# Altium PCB esp32_dht11.PcbDoc
Units mil, origin at the board's own origin, x right, y up, seen from the top; angles counter-clockwise.
Board outline 3340 x 2000 mil, 2 copper layers (Top Layer, Bottom Layer); 50 components, 36 nets, 199 pads, 47 vias.
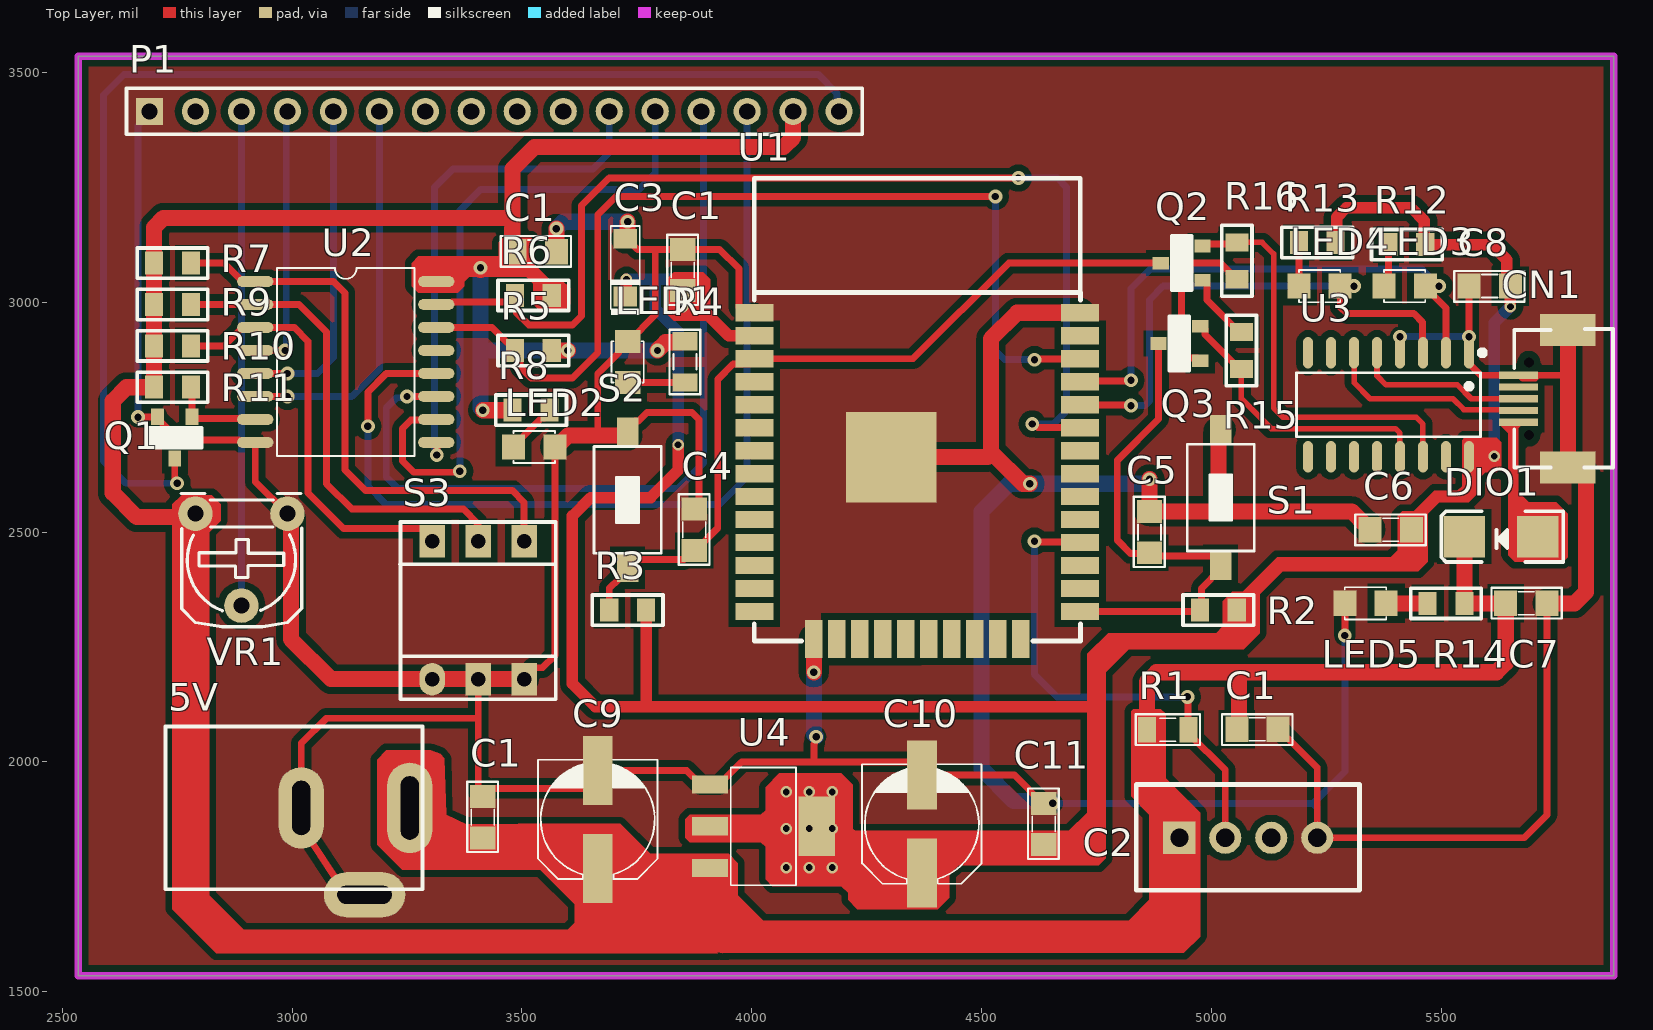
[diagram p0: Top Layer view]
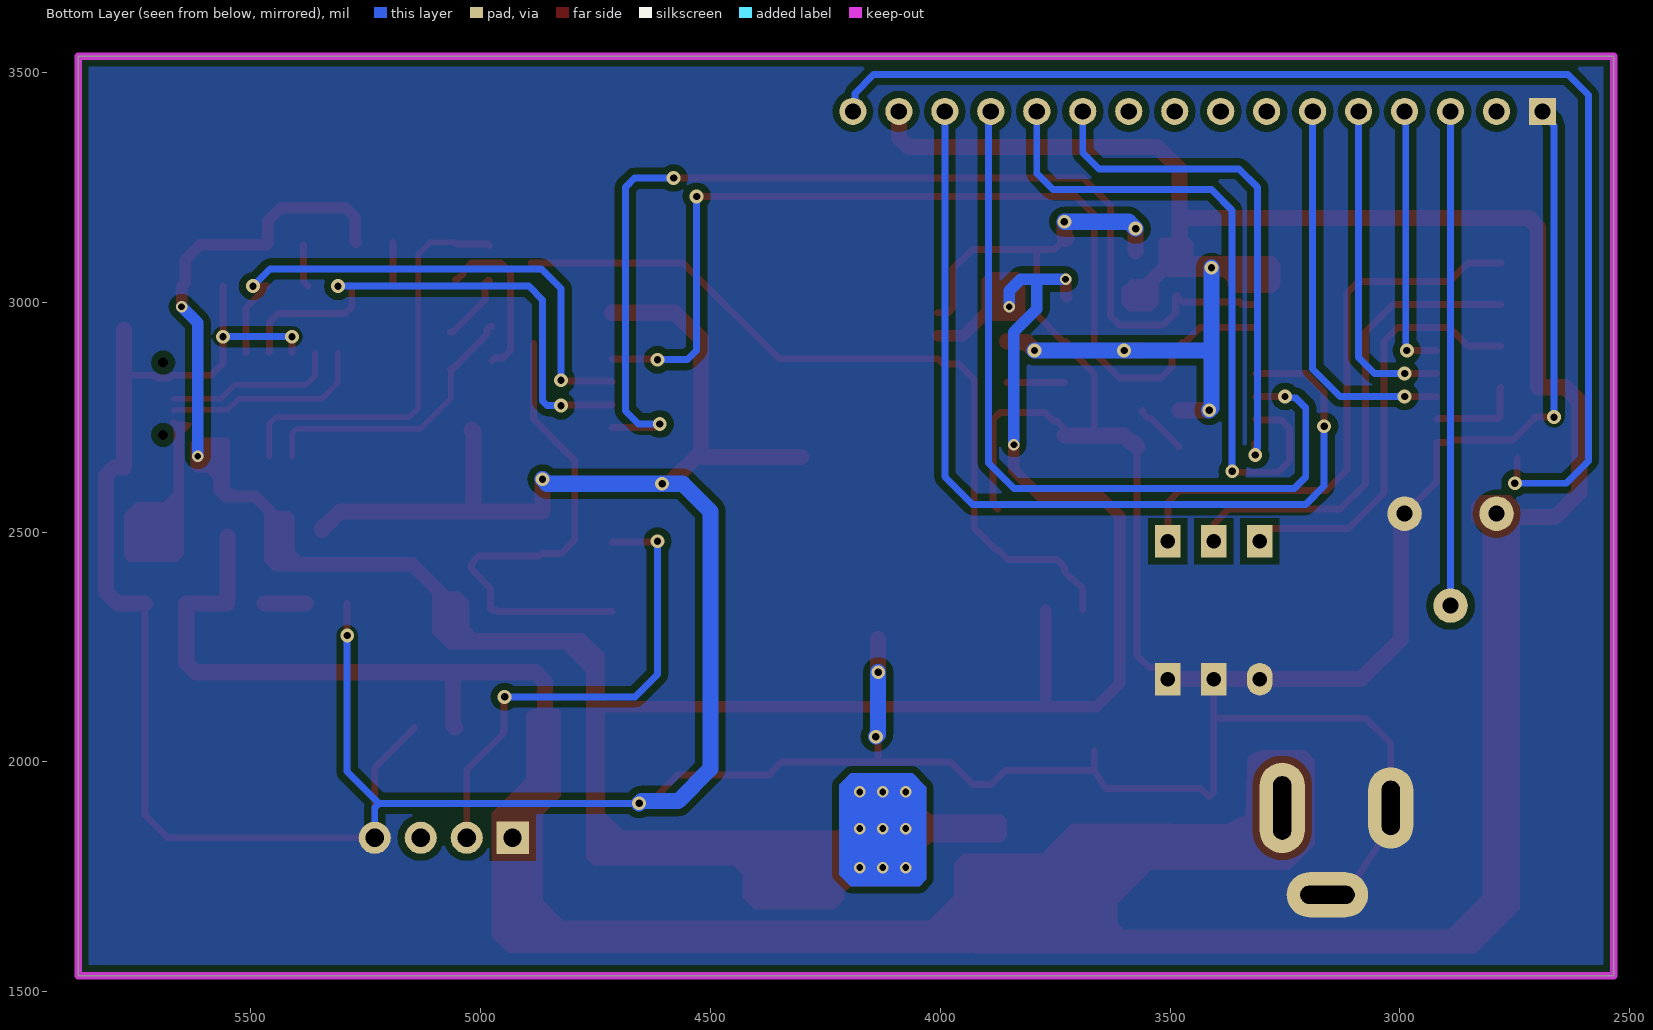
[diagram p1: Bottom Layer view, seen from below]
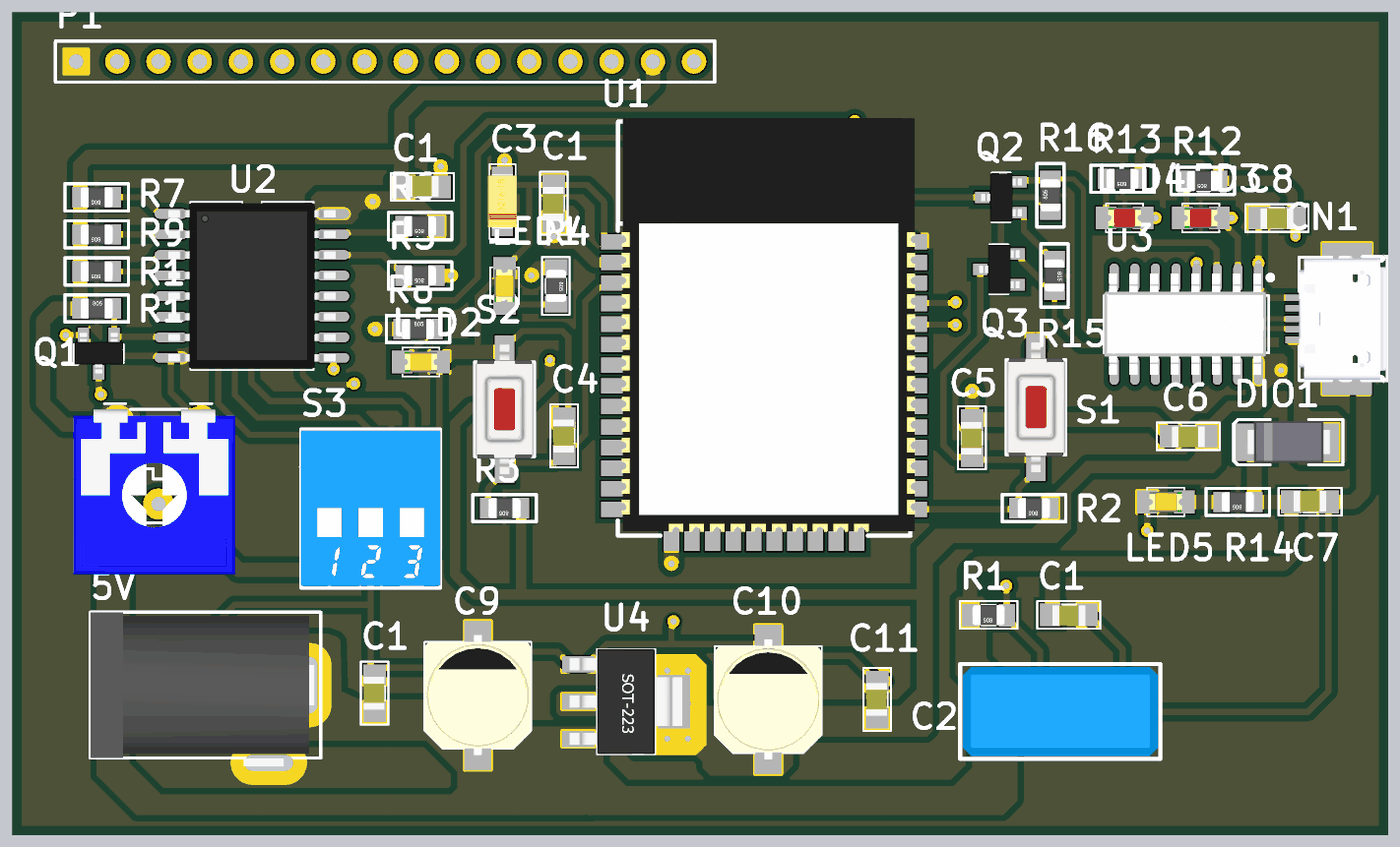
[diagram p2: 3D render of the assembled board from above, using the file's embedded part models]

## Layer stack, top to bottom
Top Solder: solder mask 0.4, Solder Resist, Dk 3.5
Top Layer: signal copper 1.4
Dielectric 1: dielectric 12.6, FR-4, Dk 4.8
Bottom Layer: signal copper 1.4
Bottom Solder: solder mask 0.4, Solder Resist, Dk 3.5

## Board outline
2535,1535 5875,1535 5875,3535 2535,3535

## Design rules (kind name [scope] priority, off if disabled: settings)
Clearance [All] p1: gap=15 ignorepadtopadclearanceinfootprint=FALSE
PlaneConnect [All] p1: planeconnectstyle=Direct reliefexpansion=20 reliefentries=4 reliefconductorwidth=10 reliefairgap=10
PolygonConnect [All] p1: connectstyle=Direct reliefconductorwidth=10 reliefentries=4 polygonreliefangle="90 Angle" airgapwidth=10
RoutingVias [All] p1: holewidth=16 width=30 viastyle="Through Hole" minholewidth=16 minwidth=30 maxholewidth=28 maxwidth=50
SolderMaskExpansion [All] p1: expansion=4 istentingtop=FALSE
Width [All] p1: maxlimit=35 minlimit=15 preferedwidth=20
29 further rules are at their usual default settings.

## Classes and differential pairs
component class U_power: "5V " C1 C9 C10 C11 U4
component class U_usbtouart: C6 C7 C8 CN1 DIO1 LED3 LED4 LED5 Q2 Q3 R12 R13 R14 R15 R16 U3
component class U_mcu: C1 C3 C4 C5 LED1 R2 R3 R4 S1 S2 U1
component class U_lcd: C1 LED2 P1 Q1 R5 R6 R7 R8 R9 R10 R11 S3 U2 VR1
component class U_dht11: C1 C2 R1

## Components (designator, comment, footprint, x,y, rotation, side; value= is the part's Value field where it differs from the comment)
5V "Jack DC5.5x2.1" DC-IN 2724.72,1722.83 r0 top (schematic designator JDC)
C1 "104" 0805 3415,1880 r270 top value=0.1uF
C1 "104" 0805 5100,2071 r0 top value=0.1uF
C1 "104" 0805 3530,3110 r180 top value=0.1uF
C1 "104" 0805 3850,3070 r270 top value=0.1uF
C2 "DHT11" DHT11 4930,1835 r0 top
C3 "22uF-1206" CAP1206_TANTALUM_YELLOW 3725,3075 r90 top value=10uF
C4 "104" 0805 3875,2505 r270 top value=0.1uF
C5 "104" 0805 4865,2500 r270 top value=0.1uF
C6 "104" 0805 5390,2505 r0 top value=0.1uF
C7 "104" 0805 5685,2345 r180 top value=0.1uF
C8 "104" 0805 5605,3035 r0 top value=0.1uF
C9 "Cap Polar" CAP_ALUMINUM_SMD_SIZE_D 3665,1875 r90 top value=100uF
C10 "Cap Polar" CAP_ALUMINUM_SMD_SIZE_D 4370,1865 r90 top value=100uF
C11 "104" 0805 4635,1865 r270 top value=0.1uF
CN1 "USB Connector" USB-B-Micro-Hole 5775,2790 r270 top
DIO1 "Diode SMD" DIO-SMD-106 5630,2490 r0 top value=1N5007
LED1 "LED" LED-0805-Orange 3730,2825 r90 top value="LED 3 - 5 ly 2 Colour"
LED2 "LED" LED-0805-Orange 3481.94,2685 r0 top value="LED 3 - 5 ly 2 Colour"
LED3 "LED" LED-0805-Red 5375,3035 r0 top value="LED 3 - 5 ly 2 Colour"
LED4 "LED" LED-0805-Red 5190,3035 r0 top value="LED 3 - 5 ly 2 Colour"
LED5 "LED" LED-0805-Orange 5380,2345 r180 top value="LED 3 - 5 ly 2 Colour"
P1 "Header 16" HDR1X16 2690,3415 r0 top
Q1 "C1815_SMD" SOT23 2745,2705.28 r180 top
Q2 "C1815_SMD" SOT23 4935,3085 r90 top
Q3 "C1815_SMD" SOT23 4930,2910 r90 top
R1 "0805-4.7K" RES-SMD-0805 4905,2070 r180 top
R2 "R0805" "DIEN TRO 0805" 5015,2330 r0 top value=0805-10K
R3 "R0805" "DIEN TRO 0805" 3730,2330 r0 top value=0805-10K
R4 "0805-1K" RES-SMD-0805 3855,2870 r270 top
R5 "R0805-4k7" "DIEN TRO 0805" 3525,2895 r0 top value=0805-4k7
R6 "R0805-4k7" "DIEN TRO 0805" 3525,3015 r0 top value=0805-4k7
R7 "R0805-10K" "DIEN TRO 0805" 2740,3085 r0 top value=0805
R8 "R0805" "DIEN TRO 0805" 3520,2765 r180 top value=0805-1K
R9 "R0805-10K" "DIEN TRO 0805" 2740,2995 r0 top value=0805
R10 "R0805-10K" "DIEN TRO 0805" 2740,2905 r0 top value=0805
R11 "R0805" "DIEN TRO 0805" 2740,2815 r180 top value=0805
R12 "R0805" "DIEN TRO 0805" 5425,3125 r0 top value=1K
R13 "R0805" "DIEN TRO 0805" 5230,3130 r0 top value=1K
R14 "R0805" "DIEN TRO 0805" 5510,2345 r0 top value=0805
R15 "R0805" "DIEN TRO 0805" 5065,2895 r90 top value=0805-10K
R16 "R0805" "DIEN TRO 0805" 5055,3090 r270 top value=0805-10K
S1 "MH001036" SW-SMD 5020,2575 r90 top value="Nút Nhấn 2 Chân 3x6x2.5MM SMD"
S2 "MH001036" SW-SMD 3730,2570 r90 top value="Nút Nhấn 2 Chân 3x6x2.5MM SMD"
S3 "SW DIP3" DIPSWITCH3 3305,2180 r0 top
U1 "ESP32-WROOM-32D-N8" ESP32-SMD 4360,2750 r270 top
U2 "PCF8574T/3,518" SO-16-WIDE 3116.85,2870 r0 top
U3 "CH340C" SOP-16_L10.0-W3.9-P1.27-LS6.0-BL 5388.44,2776.91 r180 top
U4 "AMS1117_3V3" SOT223-4M 4035,1860 r270 top
VR1 "10K" VR 2990,2540 r180 top value="VR 10K"

## Footprints (in the part's own frame and the unit in brackets; to place one, negate y for a bottom-side part, rotate by r counter-clockwise, add the part's x,y. Pads: shape width x height; smd on the part's side, far side on the other; paste and mask are expansions set on the pad)
0805 [mil] "Compoment SMD 80x50mil"
  rect 50x55 smd: 1(-45,0) 2(45,0)
  silkscreen extent -77,-34 76,33, body extent -40,-27 40,23, height 24
CAP1206_TANTALUM_YELLOW [mm]
  rect 1.1x1.3 smd: 1(-1.6,0) 2(1.6,0)
  silkscreen extent -2.6,-0.8 2.3,0.8, body extent -1.7,-0.9 1.7,0.9, height 1.75
CAP_ALUMINUM_SMD_SIZE_D [mil] "SMD Tantalum Capacitor; Size D8, Body 6.3 x 5.4 mm (LxW typ)"
  rect 150x65 smd: 1(-106.3,0) 2(106.3,0)
  silkscreen extent -130,-130 130,130, body extent -145,-130 146,130, height 303
DC-IN [mm] "Jac DC input"
  oval 2.5x5 hole 1 slot 3.5 at 90 deg: 1(13.5,4.5)
  oval 2.5x4.5 hole 1 slot 3 at 90 deg: 2(7.5,4.5)
  oval 4.5x2.5 hole 1 slot 3 at 0 deg: 3(11,-0.3)
  silkscreen extent 0,0 14.2,9, body extent 0,-0.5 13.83,9, height 11.02
DHT11 [mil]
  rect 70x70 hole 39.37 unplated: 1(0,0)
  round 70 hole 39.37 unplated: 2(100,0) 3(200,0)
  round 70 hole 39.37 unplated mask+4: 4(300,0)
  silkscreen extent -94,-114 392,116, body extent -87,-107 385,110, height 611
"DIEN TRO 0805" [mil] "Chip Resistor; Body 2.0 x 1.3 mm (LxW typ)"
  rect 39.37x50 smd: 1(-40,0) 2(40,0)
  silkscreen extent -77,-33 77,33, body extent -39,-25 39,25, height 31
DIO-SMD-106 [mil]
  rect 90x90.55 smd: 1(80,0) 2(-80,0)
  silkscreen extent -130,-55 135,55, body extent -99,-50 106,52, height 95
DIPSWITCH3 [mm]
  oval 1.4x1.8 hole 0.8: 1(0,0)
  rect 1.4x1.8 hole 0.8: 2(2.54,0) 3(5.08,0) 4(5.08,7.62) 5(2.54,7.62) 6(0,7.62)
  silkscreen extent -1.78,-1.12 6.83,8.69, body extent -1.77,-0.99 6.85,8.61, height 6.3
ESP32-SMD [mm]
  rect 0.95x2.1 smd: 1(-5.767,-9) 2(-4.497,-9) 3(-3.227,-9) 4(-1.957,-9) 5(-0.687,-9) 6(0.583,-9) 7(1.853,-9) 8(3.123,-9) 9(4.393,-9) 10(5.663,-9) 11(6.933,-9) 12(8.203,-9) 13(9.473,-9) 14(10.743,-9) 25(10.743,9) 26(9.473,9) 27(8.203,9) 28(6.933,9) 29(5.663,9) 30(4.393,9) 31(3.123,9) 32(1.853,9) 33(0.583,9) 34(-0.687,9) 35(-1.957,9) 36(-3.227,9) 37(-4.497,9) 38(-5.767,9)
  rect 2.1x0.95 smd: 15(12.264,-5.715) 16(12.264,-4.445) 17(12.264,-3.175) 18(12.264,-1.905) 19(12.264,-0.635) 20(12.263,0.635) 21(12.263,1.905) 22(12.263,3.175) 23(12.263,4.445) 24(12.263,5.715)
  rect 5x5 smd: 39(2.204,-1.45)
  silkscreen extent -13.19,-9.02 12.37,9.02, body extent -13.41,-8.76 12.13,9.31, height 3
HDR1X16 [mm] "Connector; Header; 16 Position"
  rect 1.5x1.5 hole 0.9: 1(0,0)
  round 1.5 hole 0.9: 2(2.54,0) 3(5.08,0) 4(7.62,0) 5(10.16,0) 6(12.7,0) 7(15.24,0) 8(17.78,0) 9(20.32,0) 10(22.86,0) 11(25.4,0) 12(27.94,0) 13(30.48,0) 14(33.02,0) 15(35.56,0) 16(38.1,0)
  silkscreen extent -1.27,-1.27 39.37,1.27
LED-0805-Orange [mil]
  rect 50x55 smd: 1(0,0) 2(90,0)
  silkscreen extent 0,-35 90,35, body extent 5,-25 85,25, height 43
LED-0805-Red [mil]
  rect 50x55 smd: 1(0,0) 2(90,0)
  silkscreen extent 0,-35 90,35, body extent 5,-25 85,25, height 43
RES-SMD-0805 [mil]
  rect 39.37x55 smd: 1(-45,0) 2(45,0)
  silkscreen extent -70,-34 70,33, body extent -39,-25 39,25, height 31
SO-16-WIDE [mm]
  oval 2x0.6 smd: 1(-5,4.445) 2(-5,3.175) 3(-5,1.905) 4(-5,0.635) 5(-5,-0.635) 6(-5,-1.905) 7(-5,-3.175) 8(-5,-4.445) 9(5,-4.445) 10(5,-3.175) 11(5,-1.905) 12(5,-0.635) 13(5,0.635) 14(5,1.905) 15(5,3.175) 16(5,4.445)
  silkscreen extent -3.8,-5.19 3.8,5.19, body extent -5.15,-5.1 5.15,5.1, height 3.5
SOP-16_L10.0-W3.9-P1.27-LS6.0-BL [mm]
  oval 0.56x1.745 smd: 1(-4.357,-2.873) 2(-3.087,-2.873) 3(-1.817,-2.873) 4(-0.547,-2.873) 5(0.723,-2.873) 6(1.993,-2.873) 7(3.263,-2.873) 8(4.533,-2.873) 9(4.533,2.873) 10(3.263,2.873) 11(1.993,2.873) 12(0.723,2.873) 13(-0.547,2.873) 14(-1.817,2.873) 15(-3.087,2.873) 16(-4.357,2.873)
  silkscreen extent -5.24,-3.02 5.16,1.77, body extent -4.83,-3.12 5.16,3.12, height 1.58
SOT23 [mm] "SOT 23 _ 1-3-2"
  rect 0.7x0.9 smd: 1(-0.95,-1.15) 2(0.95,-1.15) 3(0,1.15)
  silkscreen extent -1.5,-0.55 1.5,0.55, body extent -1.5,-1.28 1.5,1.22, height 1.06
SOT223-4M [mm] "SOT223, 4-Leads, Body 6.5x3.5mm, Pitch 2.3mm, Lead Span 7mm, IPC Low Density"
  rect 1x2 smd: 1(-2.3,-3.2) 2(0,-3.2) 3(2.3,-3.2)
  rect 3.3x2 smd: 4(0,2.7)
  silkscreen extent -3.25,-2.05 3.26,1.55, body extent -3.25,-3.74 3.25,3.22, height 1.67
SW-SMD [mm] "Switch SMD type"
  rect 1.6x1.2 smd: 1(-3.75,0) 2(3.75,0)
  silkscreen extent -2.95,-1.85 2.95,1.85, body extent -4,-1.8 4,1.8, height 2.5
USB-B-Micro-Hole [mm]
  round 0.4 hole 0.55: 0(-2,-2.15) 0(2,-2.15)
  rect 0.4x2.159 smd: 1(1.3,-2.725) 2(0.65,-2.725) 3(0,-2.725) 4(-0.65,-2.725) 5(-1.3,-2.725)
  rect 1.778x3.048 smd: 6(-3.8,0) 7(3.8,0)
  silkscreen extent -3.85,-2.95 3.8,2.5, body extent -3.99,-2.95 3.99,2.48, height 2.71
VR [mil] "Resistor Variable"
  round 75 hole 35: 1(0,0) 2(100,200) 3(200,0)
  silkscreen extent -31,-44 231,246, body extent -87,-30 307,372, height 165

## Part data
5V: library part Jac_DC, "Cắm", Chung_Loai=Cắm, Don_Vi=Con, Ma_Hang=MH000923, Ten_Linh_Kien="Jack DC5.5x2.1MM DC5501"
C1 C1 C1 C1 C4 C5 C6 C7 C8 C11: library part "Cap 104_SMD", "Capacitor (Semiconductor SIM Model)", LatestRevisionDate=17-Jul-2002, LatestRevisionNote="Re-released for DXP Platform.", PackageReference=C1206, Published=8-Jun-2000, Publisher="Altium Limited"
C2: Manufacturer="W¨¹rth Elektronik eiSos GmbH", partNo=613004143121, ComponentLink1 Description=Manufacturer, ComponentLink1URL=http://www.we-online.com, ComponentLink2 Description=Datasheet, ComponentLink2URL=http://katalog.we-online.de/em/datasheet/6130xx143121.pdf, Created by="Karrer Zheng", Created Date="29 March 2013", NoPins=04
C3: library part T491A106K016AT, "CAP TANT 10UF 16V 10% 1206", Capacitance=10µF, ESR (Equivalent Series Resistance)="7 Ohm", Lifetime @ Temp.="2000 Hrs @ 85°C", Manufacturer 1=KEMET, Manufacturer Size Code=A, Operating Temperature="-55°C ~ 125°C", Package / Case="1206 (3216 Metric)", Supplier Part Number 1=399-8269-1-ND, Tolerance=±10%, Voltage - Rated=16V, Category 1=Capacitors, ComponentLink1Description=http://www.kemet.com/Lists/ProductCatalog/Attachments/254/KEM_T2005_T491.pdf, ComponentLink1URL=http://www.kemet.com/Lists/ProductCatalog/Attachments/254/KEM_T2005_T491.pdf, Description 1="CAP TANT 10UF 16V 10% 1206", Failure Rate=-, Features="General Purpose", Height - Seated (Max)="0.071\" (1.80mm)", Lead Spacing=-, Manufacturer Part Number 1=T491A106K016AT, Mounting Type="Surface Mount", Packaging="Cut Tape (CT)", Part Status=Active, Pricing 1="1=0.45, 10=0.312, 100=0.1873, 500=0.14048, 1000=0.11862 (USD)", RoHS 1="RoHS Compliant", Size / Dimension="0.126\" L x 0.063\" W (3.20mm x 1.60mm)", Stock 1=54083, Supplier 1=Digi-Key, Type=Molded
C9 C10: "Polarized Capacitor", LatestRevisionDate=17-Jul-2002, LatestRevisionNote="Re-released for DXP Platform.", PackageReference=POLAR0.8, Published=8-Jun-2000, Publisher="Altium Limited"
CN1: library part USB_MICRO_TYPE_B
DIO1: "Default Diode", Code - JEDEC=DO-214-AB, Published=8-Jun-2000, Publisher="Altium Limited", Revision="July-2002: Re-released for DXP Platform."
LED1 LED2 LED3 LED4 LED5: library part "LED SMD"
P1: "Header, 16-Pin", LatestRevisionDate=17-Jul-2002, LatestRevisionNote="Re-released for DXP Platform.", Publisher="Altium Limited"
Q1 Q2 Q3: "NPN General Purpose Amplifier", Code_JEDEC=TO-92A, ComponentLink1Description="Manufacturer Link", ComponentLink1URL=http://www.fairchildsemi.com/, ComponentLink2Description=Datasheet, ComponentLink2URL=http://www.fairchildsemi.com/ds/2N%2F2N3904.pdf, DatasheetVersion=1997, LatestRevisionDate=15-Jan-2003, LatestRevisionNote="PCB Footprint 'BCY-W3/D4.7' replaced", PackageReference=TO-92A, PackageVersion=Sep-1998, Published=8-Jun-2000, Publisher="Altium Limited"
R1 R4: library part Res-SMD, "Resistor", Manufacturer="Generic Components", Class=Passive, Published=08/06/2000, Publisher="Altium Hobart Technology Centre"
R2 R3 R11 R12 R13 R14 R15 R16: "Resistor SMD 0805", LatestRevisionDate=17-Jul-2002, LatestRevisionNote="Re-released for DXP Platform.", PackageReference=AXIAL-0.4, Published=8-Jun-2000, Publisher="Altium Limited"
R5 R6: library part R0805, "Resistor SMD 0805", LatestRevisionDate=17-Jul-2002, LatestRevisionNote="Re-released for DXP Platform.", PackageReference=AXIAL-0.4, Published=8-Jun-2000, Publisher="Altium Limited"
R7 R9 R10: library part R0805, "Resistor SMD 0805-10K", LatestRevisionDate=17-Jul-2002, LatestRevisionNote="Re-released for DXP Platform.", PackageReference=AXIAL-0.4, Published=8-Jun-2000, Publisher="Altium Limited"
R8: "Resistor SMD 0805-1K", LatestRevisionDate=17-Jul-2002, LatestRevisionNote="Re-released for DXP Platform.", PackageReference=AXIAL-0.4, Published=8-Jun-2000, Publisher="Altium Limited"
S1 S2: library part SW-SMD, "Dán"
S3: "DIP Switch, 3 Position, SPST", Code_JEDEC=MO-001-AM, LatestRevisionDate=17-Jul-2002, LatestRevisionNote="Re-released for DXP Platform.", PackageReference=DIP-6, Published=24-Mar-1999, Publisher="Altium Limited"
U2: "IC I/O EXPANDER I2C 8B 16SOIC", Current - Output Source/Sink="300µA, 25mA", Manufacturer="NXP USA Inc.", Operating Temperature="-40°C ~ 85°C", Package / Case="16-SOIC (0.295\", 7.50mm Width)", Supplier Device Package=16-SO, Supplier Part Number 1=568-1077-1-ND, Voltage - Supply="2.5 V ~ 6 V", Category="Integrated Circuits (ICs)", ComponentLink1Description=http://www.nxp.com/documents/data_sheet/PCF8574_PCF8574A.pdf, ComponentLink1URL=http://www.nxp.com/documents/data_sheet/PCF8574_PCF8574A.pdf, Features=POR, Interface=I²C, Interrupt Output=Yes, Manufacturer Part Number=PCF8574T/3,518, Mounting Type="Surface Mount", Number of I/O=8, Output Type=Push-Pull, Packaging="Cut Tape (CT)", Part Status=Active, Pricing 1="1=1.22, 10=1.094, 100=0.8528, 500=0.70452 (USD)", RoHS="RoHS Compliant", Stock 1=21482, Supplier 1=Digi-Key
U4: "1A Regulator"
VR1: library part VR_1, "Var Resistor"

## Via types
v1: diameter 30, hole 16, Top Layer to Bottom Layer, 33 vias
v2: diameter 25, hole 15, Top Layer to Bottom Layer, 14 vias

## Nets (pads, with @x,y where several pads share a name; then routed paths per layer and width w, separated by ;. In a path a pad name is that pad's centre, name@x,y a point inside that pad or via, vN(x,y) a via of type N, cw(c..) or ccw(c..) an arc to the next point about the centre after c; other vN are vias at no path point)
5V: P1.2
+3V3: C1.2@3850,3025 C3.1 C6.2 C8.2 C10.1 C11.2 R2.2 R3.2 R12.2 R13.2 U1.2 U3.16 U4.2 U4.4 | length 3932.1
  Top Layer w20: U4.4 4146.3,1855 v2(4175,1855)
  Top Layer w25: C3.1 3727.5,3014.51 v2(3727.5,3050) ; R3.2 3770,2125 3775,2120 ; v2(3840,2690) 3840,2635 3780,2575 3650,2575 3610,2535 3610,2170 3660,2120 3770,2120 4745,2120 4750,2115 ; v2(3850,2990) 3850,3025 3852.5,3025 3909.5,2968 3909.5,2967.21 3949.67,2927.03 U1.2 ; R13.2 5272.19,3132.19 5272.19,3184.5 5292.69,3205 5435,3205 5462.81,3177.19 5462.81,3127.19 R12.2 5610,3125 5642.5,3092.5 5642.5,3042.5 C8.2 v2(5650,2990) ; U3.16 5561.18,2665 v2(5615,2665)
  Bottom Layer w25: v2(3727.5,3050) 3790,3050 ; v2(3840,2690) 3840,2935 3790,2985 3790,3050 ; v2(3850,2990) 3850,3025 3825,3050 3790,3050 ; v2(5615,2665) 5615,2955 v2(5650,2990)
  other v2: 4075,1770 4125,1770 4175,1770 4075,1855 4125,1855 4075,1935 4125,1935 4175,1935
+5: 5V.1 C1.1@5055,2071 C1.2@3415,1835 C1.2@3485,3110 C2.1 C7.2 C9.1 DIO1.2 P1.15 R1.2 R4.1 R5.2 R6.2 R7.1 R8.2 R9.1 R10.1 R11.2 R14.2 U2.16 U4.3 VR1.3 | length 4780
  Top Layer w35: VR1.3 2782.35,2532.35 2662.65,2532.35 2610,2585 2610,2785 2640,2815 R11.2 R10.1 R9.1 R7.1 2700,3162.83 2720.5,3183.33 3480,3183.33 ; v1@3410,3070 v1(3410,3075) ; v1(3415,2765) R8.2 ; C1.2@3485,3110 3479.13,3115.87 3479.13,3160.87 3480,3161.75 3480,3183.33 ; R5.2 v1(3600,2895) ; v1(3795,2895) 3812.82,2912.82 3845,2912.82 3847.19,2915 R4.1 ; P1.15 4090,3358.2 4069.5,3337.7 3527.7,3337.7 3480,3290 3480,3183.33 ; R1.2 4860,2174.5 4880.5,2195 5060,2195 ; C1.1@5055,2075 5060,2080 5060,2195 ; DIO1.2 R14.2 C7.2 5640,2215.5 5619.5,2195 5060,2195
  Bottom Layer w35: v1(3410,3075) 3410,2895 ; v1(3415,2765) 3410,2770 3410,2895 ; v1(3795,2895) 3410,2895
CS: P1.6 U2.6 | length 854.9
  Top Layer w15: U2.6 v1(2990,2795)
  Bottom Layer w15: v1(2990,2795) 3130,2795 3190,2855 P1.6
DB4: P1.11 U2.9 | length 1113.7
  Top Layer w15: U2.9 3315,2693.7 v1(3315,2667.5)
  Bottom Layer w15: v1(3315,2667.5) 3312.13,2670.37 3312.13,2680.98 3310,2683.11 3310,3250 3350,3290 3655,3290 3690,3325 P1.11
DB5: P1.12 U2.10 | length 1449
  Top Layer w15: U2.10 3312.05,2743.35 3258.35,2743.35 3240,2725 3240,2655 3265,2630 3362.5,2630 v1(3365,2632.5)
  Bottom Layer w15: v1(3365,2632.5) 3365,3200 3410,3245 3755,3245 3790,3280 P1.12
DB6: P1.13 U2.11 | length 1759.3
  Top Layer w15: v1(3250,2795) U2.11
  Bottom Layer w15: v1(3250,2795) 3247.13,2792.13 3227.13,2792.13 3205,2770 3205,2620 3230,2595 3840,2595 3895,2650 3895,3410 P1.13
DB7: P1.14 U2.12 | length 2031.7
  Top Layer w15: v1(3165,2730) 3165,2805 3205,2845 U2.12
  Bottom Layer w15: v1(3165,2730) 3165,2600 3205,2560 3930,2560 3990,2620 P1.14
DTR: Q3.2 R15.1 U3.13 | length 627.2
  Top Layer w12: R15.1 5065,2790 5130,2725 5400,2725 5410,2715 U3.13
  Top Layer w15: Q3.2 4979.21,2947.4 4985.49,2941.12 4985.49,2929.51 5047.5,2867.5 5047.5,2867.19 5059.69,2855 R15.1
EN: C4.2 Q2.3 R3.1 S2.1 U1.3 | length 1735.4
  Top Layer w15: R3.1 3690,2377.5 3710.87,2398.37 3713.88,2398.37 3730,2414.49 3730,2423.88 3746.12,2440 3852.5,2440 3872.5,2460 3877.5,2460 3926.04,2508.54 3926.04,2832.19 3959.69,2865.83 3994.47,2865.83 U1.3 4351.13,2877.03 4559.09,3085 Q2.3
GND: 5V.2 5V.3 C1.1@3415,1925 C1.1@3575,3110 C1.1@3850,3115 C1.2@5145,2071 C2.4 C3.2 C4.1 C5.1 C6.1 C7.1 C8.1 C9.2 C10.2 C11.1 CN1.5 CN1.6 CN1.7 LED1.2 LED2.2 LED5.2 P1.1 Q1.2 S1.2 S2.2 S3.1 S3.2 S3.3 U1.1 U1.15 U1.38 U1.39 U2.8 U3.1 U3.4 U4.1 VR1.1 | length 13218.9
  Top Layer w15: v1(2665,2750) 2665.28,2750.28 2707.32,2750.28 Q1.2 2707.6,2746.61 2754,2700.22 2818.62,2700.22 2818.84,2700 2885.11,2700 2890.11,2695 U2.8 2920,2610 VR1.1 ; 5V.3 3118.43,1711.02 3020,1860.63 5V.2 3020,2040 3075,2095 3405,2095 ; S3.2 3405,2095 ; S3.3 3505,2184.85 3525.06,2204.91 3544.91,2204.91 3571.94,2231.94 LED2.2 ; C9.2@3665,2023.8 C9.2 ; 3665,2709.76 3665,2844.32 3710,2889.32 3710,2897.5 3727.5,2915 LED1.2 3732.5,2915 3790,2972.5 3790,3115 ; C3.2 3725.85,3137.99 3728.94,3137.99 3751.93,3115 3790,3115 ; S2.2 3730,2725.51 3746.12,2741.63 3754,2741.63 3772.36,2760 3870,2760 3885,2745 3885,2560 C4.1 ; U1.1 3983.04,2977.03 3971.84,2988.23 3971.84,3073.16 3930,3115 3850,3115 3790,3115 ; v1(4140,2055) 4137.13,2052.13 4137.13,2041.52 4135,2039.39 4135,2000 ; v1(4655,1910) C11.1 4632.5,1910 4571.2,1971.3 C10.2 4370,1975 4345,2000 4135,2000 ; C1.2@5145,2075 5145,2072.5 5230,1987.5 C2.4 5680,1835 5730,1885 C7.1 ; v1(5290,2275) LED5.2 ; U3.4 v1(5410,2925) ; C8.1 v1(5560,2925) U3.1 5560,2866.67 5585.49,2841.18 CN1.5 5670.78,2841.18 5676.55,2835.41 5704.16,2835.41 5709.93,2841.18 5773.82,2841.18 5775,2840 ; 3405,2095 3405,1935 3415,1925 3435,1942.5 3640,1942.5 C9.2 ; C9.2 3858.58,1981.3 3889.33,1950.55 U4.1 3928.7,1950.55 3978.15,2000 4135,2000
  Top Layer w20: S2.2@3730,2709.76 S2.2
  Top Layer w35: VR1.1 2997.65,2532.35 2997.65,2267.35 3085,2180 S3.1 S3.2 S3.3 ; LED2.2 3571.94,2687.5 3579.44,2695 3585.18,2695 3599.94,2709.76 3665,2709.76 S2.2@3730,2709.76 ; C1.1@3575,3110 v1(3575,3160) ; C3.2@3725.85,3137.99 3730,3142.15 v1(3730,3175) ; v1(4135,2195) U1.15 ; U1.39 4513.24,2663.24 4520,2670 4520,2920 4577.03,2977.03 U1.38 ; 4522.5,2672.5 4590,2605 v1(4605,2605) ; v1(4865,2615) C5.1 5015,2545 ; S1.2 5015,2717.64 5015,2545 ; C6.1 5345,2507.5 5337.5,2515 5335,2515 5305,2545 5015,2545 ; C7.1 5790,2345 5815,2370 5815,2622.89 5797.5,2640.39 CN1.7 5775,2840 CN1.6
  Bottom Layer w15: v1(2665,2750) 2665,3384.19 2667.97,3387.16 2667.97,3392.97 P1.1 ; v1(4655,1910) 5221.21,1910 ; C2.4 5230,1901.21 5221.21,1910 ; v1(5290,2275) 5290,1978.79 5221.21,1910 ; v1(5410,2925) v1(5560,2925)
  Bottom Layer w35: v1(3575,3160) 3590,3175 v1(3730,3175) ; v1(4135,2195) 4135,2060 v1(4140,2055) ; v1(4655,1910) 4650,1915 4570,1915 4500,1985 4500,2545 4560,2605 v1(4605,2605) 4855,2605 v1(4865,2615)
IO0: C5.2 Q3.3 R2.1 S1.1 U1.25 | length 1093.1
  Top Layer w15: U1.25 4962.5,2327.03 4965.47,2330 R2.1 4978.01,2333.01 4978.01,2377.5 5020,2419.49 5020,2431.74 5003.88,2447.87 4872.13,2447.87 4866.46,2453.54 4823.79,2453.54 4795,2482.32 4795,2655.98 4884.72,2745.71 Q3.3
K: P1.16 Q1.3 | length 2703.8
  Top Layer w15: Q1.3 2745,2615.15 2750,2610.15 v1(2750,2606.09)
  Bottom Layer w15: v1(2750,2606.09) 2638.91,2606.09 2590,2655 2590,3387.57 2590,3450.5 2634.5,3495 4145,3495 4185.71,3454.29 4185.71,3419.29 P1.16
NetC2_2: C2.2 R1.1 U1.28 | length 1083.8
  Top Layer w15: v1(4615,2480) 4616.49,2478.51 4712.84,2478.51 U1.28 ; v1(4947.5,2141.41) 4948.75,2140.16 4948.75,2071.25 R1.1 4950,2062.19 5030,1982.19 C2.2
  Bottom Layer w15: v1(4615,2480) 4615,2190 4663.59,2141.41 v1(4947.5,2141.41)
NetCN1_1: CN1.1 DIO1.1 | length 275.2
  Top Layer w15: CN1.1 5667.71,2735.75 5657.03,2725.06 5657.03,2543.25 5710,2490.28 DIO1.1
NetCN1_2: CN1.2 U3.6 | length 447.8
  Top Layer w12: U3.6 5310,2825 5345,2790 5525,2790 5548.87,2766.13 5666,2766.13 CN1.2
NetCN1_3: CN1.3 U3.5 | length 378.4
  Top Layer w12: U3.5 5360,2840 5380,2820 5535,2820 5565,2790 CN1.3
NetLED1_1: LED1.1 R4.2 | length 125
  Top Layer w15: LED1.1 R4.2
NetLED2_1: LED2.1 R8.1 | length 115.8
  Top Layer w15: LED2.1 3481.94,2687.5 3541.94,2747.5 3547.81,2747.5 3560,2759.69 R8.1
NetLED3_1: LED3.1 R12.1 | length 94.1
  Top Layer w15: LED3.1 5385,3045 R12.1
NetLED3_2: LED3.2 U1.35 U3.2 | length 1193.8
  Top Layer w15: U1.35 4715.81,2828.51 4823.51,2828.51 v1(4825,2830) ; LED3.2 v1(5495,3035) ; LED3.2@5473.75,3023.75 5510,2987.5 U3.2
  Bottom Layer w15: v1(4825,2830) 4825,3030 4867.5,3072.5 5457.5,3072.5 v1(5495,3035)
NetLED4_1: LED4.1 R13.1 | length 95
  Top Layer w15: LED4.1 R13.1
NetLED4_2: LED4.2 U1.34 U3.3 | length 1167.6
  Top Layer w15: U1.34 4715.34,2776.01 4823.99,2776.01 v1(4825,2775) ; v1(5310,3035) LED4.2 5280,2990 5295,2975 5440,2975 5458.65,2956.35 5458.65,2891.35 U3.3
  Bottom Layer w15: v1(4825,2775) 4855,2775 4865,2785 4865,3005 4895,3035 v1(5310,3035)
NetLED5_1: LED5.1 R14.1 | length 90
  Top Layer w35: LED5.1 R14.1
NetQ2_1: Q2.1 R15.2 | length 153.1
  Top Layer w15: Q2.1 4984.21,3047.6 4990.49,3041.32 4990.49,3004.51 5047.5,2947.5 5047.5,2947.19 5059.69,2935 R15.2
NetQ3_1: Q3.1 R16.2 | length 365.4
  Top Layer w15: Q3.1 4969,2878.88 4951.12,2878.88 4935,2895 4935,3065 4955,3085 5020,3085 5037.5,3067.5 5037.5,3062.19 5049.69,3050 R16.2
NetR5_1: R5.1 U1.36 U2.14 | length 2147.4
  Top Layer w15: U2.14 3435,2945 3467.5,2912.5 3472.81,2912.5 3485,2900.31 R5.1 3495.75,2884.25 3495.75,2859.25 3520,2835 3610,2835 3665,2890 3665,3190 3705,3230 v1(4530,3230) ; v1(4615,2875) 4616.01,2876.01 4713.31,2876.01 U1.36
  Bottom Layer w15: v1(4530,3230) 4530,2895 4550,2875 v1(4615,2875)
NetR6_1: R6.1 U1.33 U2.15 | length 2390.8
  Top Layer w15: U2.15 3343.59,2995 3348.59,3000 3472.81,3000 3485,3012.19 R6.1 3488.71,3011.29 3488.71,2976.29 3515,2950 3610,2950 3630,2970 3630,3210 3690,3270 v1(4580,3270) ; v1(4610,2735) 4614.06,2735 4622.03,2727.03 U1.33
  Bottom Layer w15: v1(4580,3270) 4665,3270 4685,3250 4685,2763.79 4656.21,2735 v1(4610,2735)
NetR7_2: R7.2 S3.4 U2.1 | length 1250.7
  Top Layer w15: R7.2 2852.44,3085 2892.44,3045 U2.1 3090,3045 3115,3020 3115,2635 3160,2590 3479.64,2590 3505,2564.64 S3.4
NetR9_2: R9.2 S3.5 U2.2 | length 1053.8
  Top Layer w15: R9.2 U2.2 3015,2995 3075,2935 3075,2605 3130,2550 3372.87,2550 3405,2517.87 S3.5
NetR10_2: R10.2 S3.6 U2.3 | length 932.1
  Top Layer w15: R10.2 2852.44,2905 2892.44,2945 U2.3 3005,2945 3035,2915 3035,2585 3112.07,2507.93 3284.94,2507.93 3305,2487.87 S3.6
P3: Q1.1 R11.1 U2.7 | length 205.3
  Top Layer w15: R11.1 2782.4,2812.6 Q1.1 2786.3,2746.65 2918.35,2746.65 U2.7
RS: P1.4 U2.4 | length 587.1
  Top Layer w15: U2.4 v1(2985,2895)
  Bottom Layer w15: v1(2985,2895) 2987.5,2897.5 2987.5,3412.5 P1.4
RTS: Q2.2 R16.1 U3.14 | length 913.9
  Top Layer w12: R16.1 5110,3130 5135,3105 5135,2770 5155,2750 5445,2750 5460,2735 U3.14
  Top Layer w15: Q2.2 4984.07,3126.2 5051.2,3126.2 R16.1
RW: P1.5 U2.5 | length 719.5
  Top Layer w15: U2.5 v1(2990,2845)
  Bottom Layer w15: v1(2990,2845) 3055,2845 3090,2880 P1.5
VO: P1.3 VR1.2 | length 1075
  Bottom Layer w15: VR1.2 P1.3
pads on no net: C2.3 CN1.0 CN1.4 P1.7 P1.8 P1.9 P1.10 U1.4 U1.5 U1.6 U1.7 U1.8 U1.9 U1.10 U1.11 U1.12 U1.13 U1.14 U1.16 U1.17 U1.18 U1.19 U1.20 U1.21 U1.22 U1.23 U1.24 U1.26 U1.27 U1.29 U1.30 U1.31 U1.32 U1.37 U2.13 U3.7 U3.8 U3.9 U3.10 U3.11 U3.12 U3.15

## Polygon pours and split planes (outlines as drawn)
GND on Top Layer "GND_L01_P000" (solid, pour order 0): 2535,3535 5875,3535 5875,1535 2535,1535
GND on Bottom Layer "GND_L02_P001" (solid, pour order 1): 2535,3535 2535,1535 5875,1535 5875,3535

## Keep-outs
Keep-Out Layer:
  the board outline again, w15.75

## Other copper
Top Layer:
  region net +3V3: 4020,1825 4030,1815 4030,1745 4045,1730 4115,1730 4087.5,1757.5 4087.5,1812.5 4075,1825
  region net +3V3: 4105,1975 4060,1975 4030,1945 4030,1895 4020,1885 4075,1885 4090,1900
  region net +3V3: 3830,3065 3815,3050 3815,2975 3830,2960 3901.49,2960 3910,2968.51 3910,3050 3895,3065
  region net +5: 3926.39,1584.34 3924.67,1586.06 3936.62,1583.68 3950,1585 4940,1585 4975,1620 4975,1890 4945,1920 4900,1965 4900,2105 4890,2115 4830,2115 4825,2110 4825,1925 4865,1885 4865,1700 4820,1655 4025,1655 3970,1710 3970,1780 3950,1800 3779.19,1800 3714.19,1865 3492.5,1865 3378.78,1865 3335,1885 3331.63,2007.84 3322.35,2017.86 3301.77,2025 3205,2025 3185,2005 3185,1820 3240,1765 3540,1765 3615,1690 3615,1650 3600,1635 2895,1635 2820,1710 2820,2500 2845,2525 2845,2560 2825,2580 2760,2580 2740,2560 2740,1680 2835.66,1584.34 3640.66,1584.34
  region net NetCN1_1: 5630,2730 5645,2715 5645,2450 5660,2435 5765,2435 5775,2445 5775,2540 5750,2565 5690,2565 5667.71,2587.29 5667.71,2743.06 5629.64,2737.93
  region net +3V3: 4665,1775 4755,1775 4770,1790 4770,2195 4820,2245 5070,2245 5105,2280 5105,2355 5105,2365 5155,2415 5450,2415 5470,2435 5470,2540 5495,2565 5560,2565 5580,2585 5580,2615 5595,2630 5620,2630 5630,2640 5630,2695 5620,2705 5550,2705 5545,2700 5545,2600 5535,2590 5485,2590 5440,2545 5415,2545 5405,2535 5405,2460 5390,2445 5142.5,2445 5067.5,2370 5045,2370 5025,2350 5025,2295 5010,2280 4775,2280 4730,2235 4730,1890 4690,1850 4665,1850
  region net +3V3: 4655,1850 4665,1850 4675,1840 4675,1830
  pour cut-out: 4106.25,1812.12 4163.9,1810.94 4147.5,1825 4106.25,1825
  region net +3V3: 4075,1825 4087.5,1812.5 4087.5,1757.5 4115,1730 4195,1730 4210,1715 4210,1700 4230,1680 4405,1680 4430,1705 4430,1755 4450,1775 4665,1775 4675,1785 4675,1830 4655,1850 4225,1850 4220,1855 4220,1950 4195,1975 4105,1975 4090,1960 4090,1900 4075,1885 3865,1885 3855,1875 3855,1835 3865,1825 4065,1825
  region net +5: 3260,3035 3275,3020 3360,3020 3375,3035 3375,3045 3385,3055 3510,3055 3525,3040 3525,2995 3540,2980 3590,2980 3605,2995 3605,3030 3585,3050 3550,3050 3560,3050 3525,3085 3525,3135 3520,3140 3460,3140 3450,3130 3450,3100 3275,3100 3260,3085
Bottom Layer:
  region net +3V3: 4060,1975 4030,1945 4030,1745 4045,1730 4195,1730 4220,1755 4220,1950 4195,1975

## Silkscreen, mask and mechanical layers (free items; w line width, h text height)
Top Solder:
  region: 4060,1975 4030,1945 4030,1745 4045,1730 4195,1730 4220,1755 4220,1950 4195,1975
Bottom Solder:
  region: 4060,1975 4030,1945 4030,1745 4045,1730 4195,1730 4220,1755 4220,1950 4195,1975